# Altium PCB PCB1.PcbDoc (part 7 of 7)
Units mil, origin at the board's own origin, x right, y up, seen from the top; angles counter-clockwise.
Board outline 2100 x 2700 mil, 6 copper layers (Top Layer, Layer 2, Layer 3, Layer 4, Layer 5, Bottom Layer), stack 32.112 mil thick; 200 components, 319 nets, 1280 pads, 807 vias.
Unrouted connection lines stored in the file: 4.
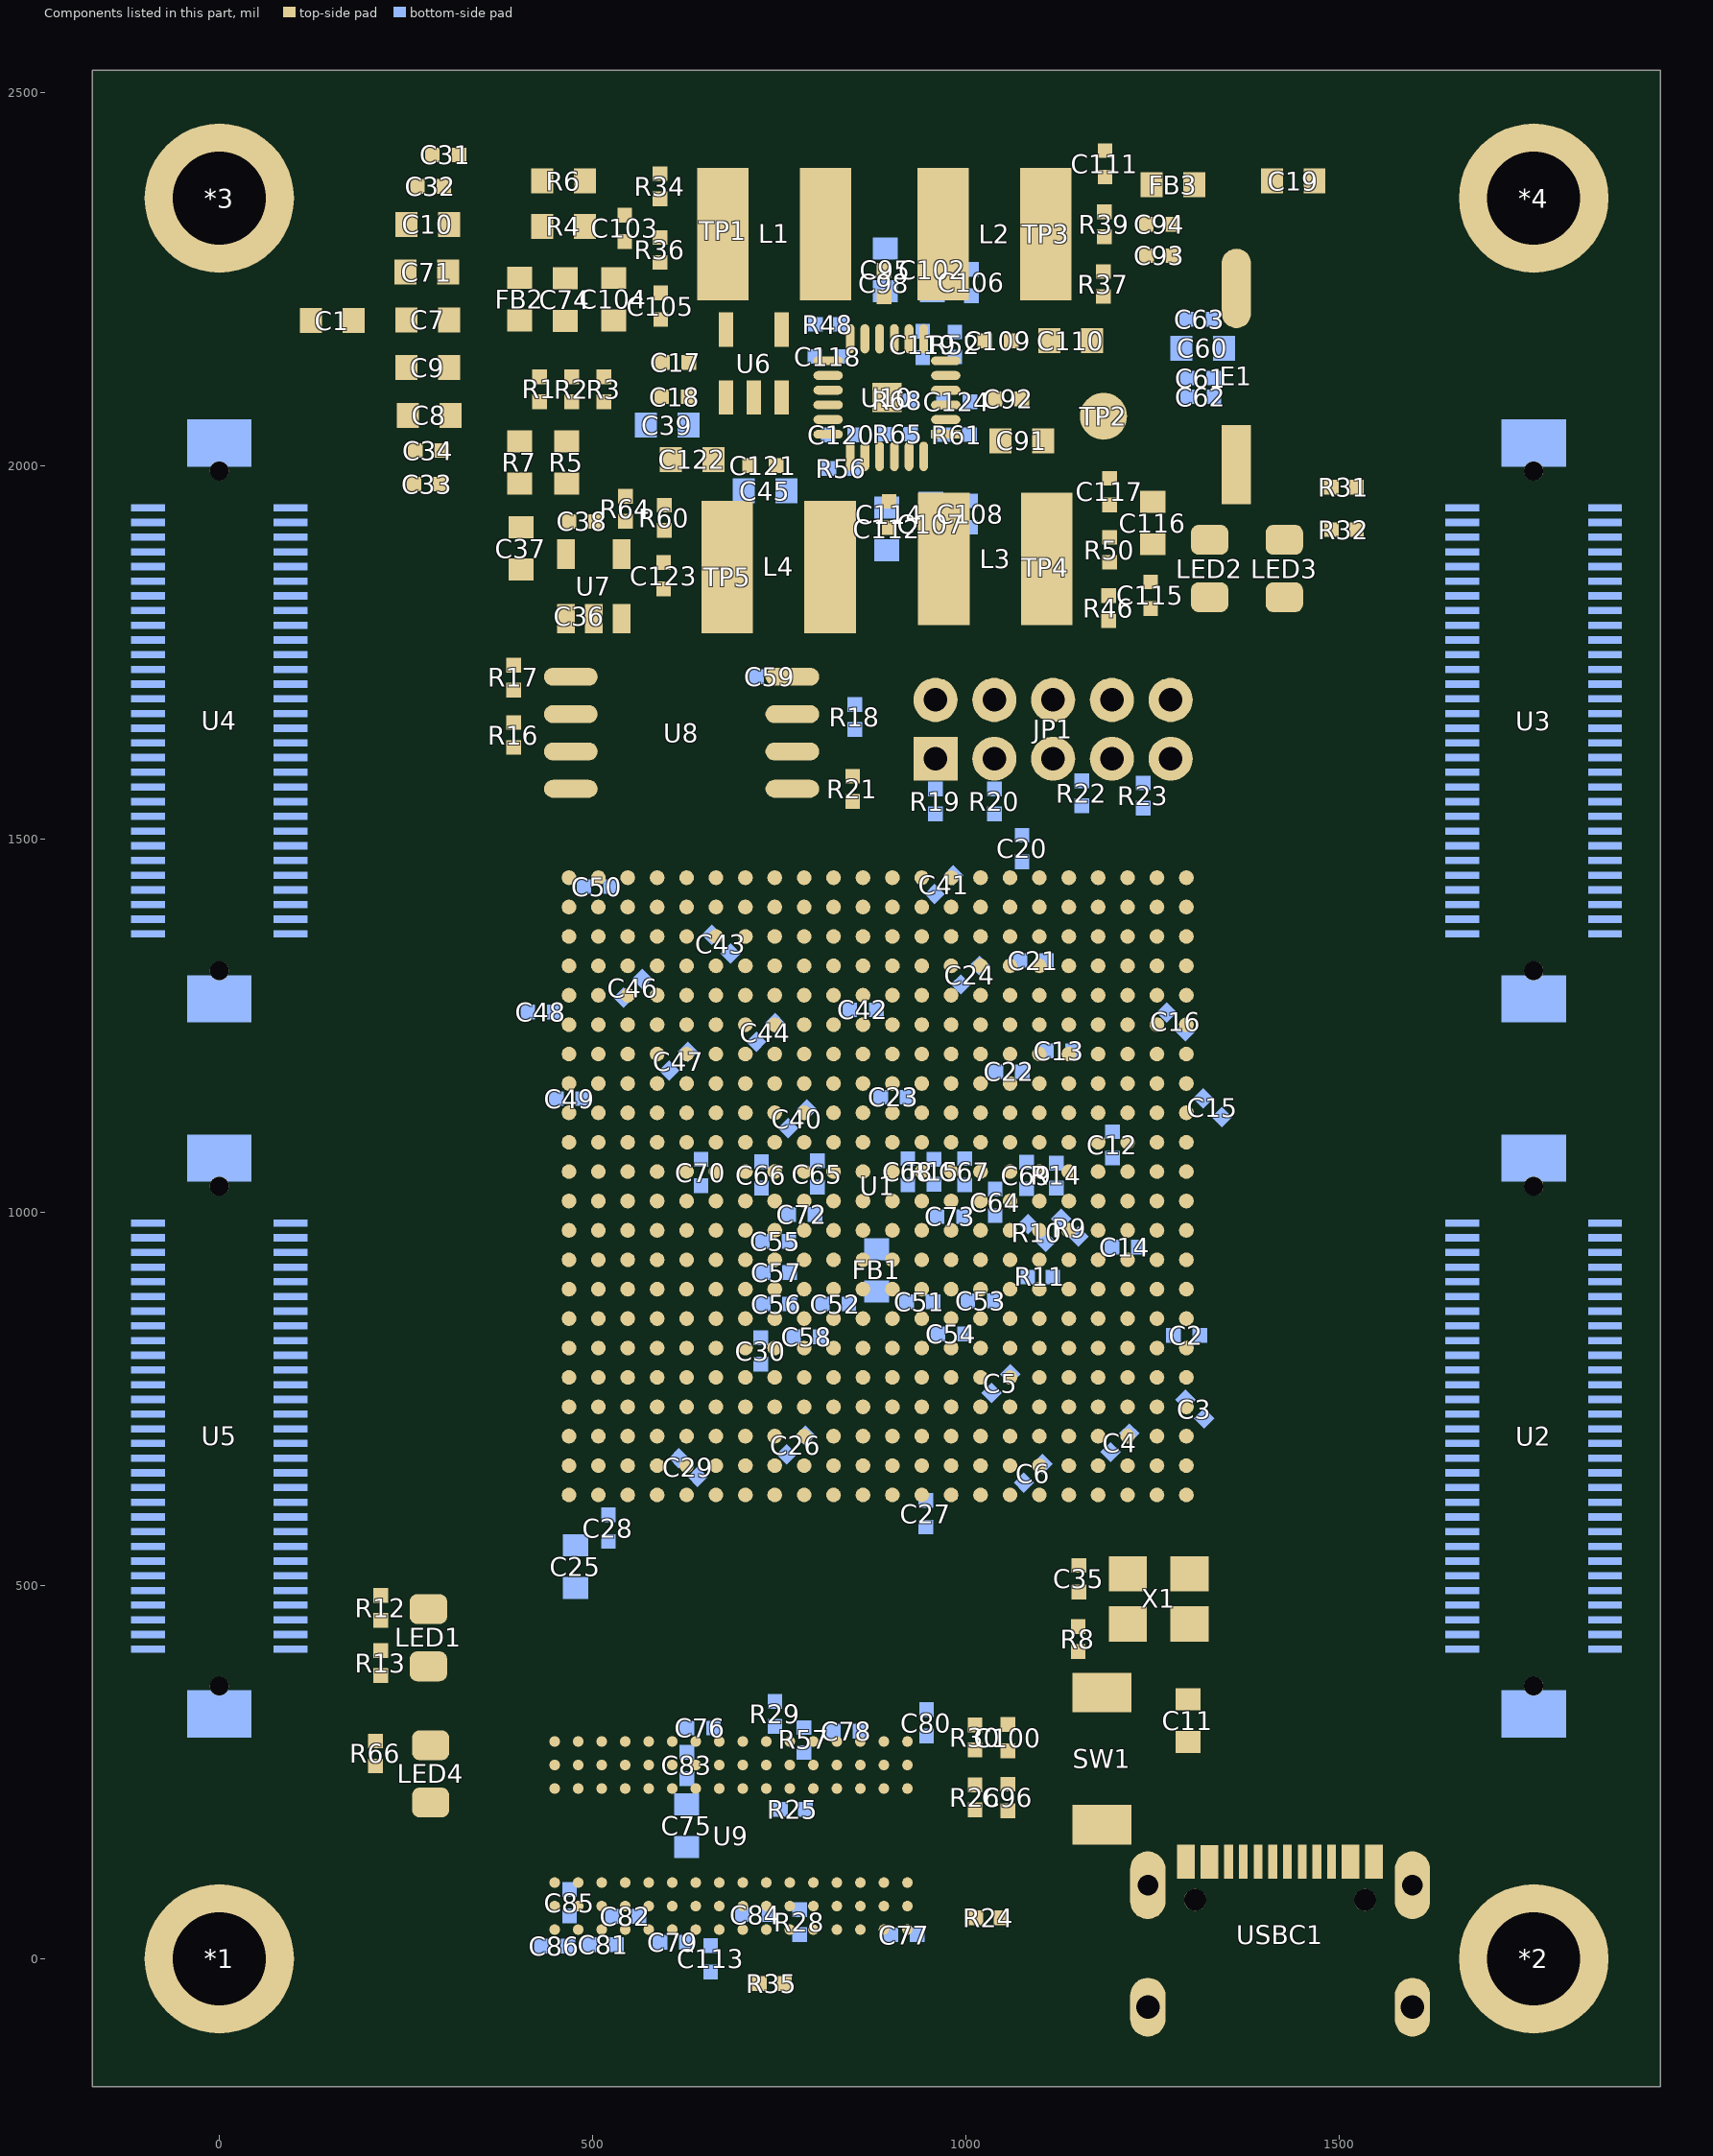
[diagram p11: the components of this part, seen from the top]

## Other copper
Top Layer:
  rectangle net +3.3_B: 642.09,2151.37 721,2184
  rectangle net NetL3_2: 943.21,1959 970,2029
  rectangle net NetL4_2: 812,1949 847,2030
  rectangle net NetL2_2: 943,2174 1002,2229
  rectangle net NetL1_2: 793,2185 846,2232
  region net GND: 1565,209 1535,209 1535,109 1565,109
  region net +5: 1527,209 1503,209 1503,108 1527,108
  rectangle net +5: 1314,107 1338,225
  rectangle net GND: 1276,108 1306,225
  pour cut-out: 43.85,1164.29 56.44,1176.87 830.16,1176.87 1123.29,1470 1377.63,1470 1454.42,1393.21 1451,1389.79 1451,974.74 1615.38,810.36 1615.38,697.77 1571.77,697.77 1464,590 423,590 423,771 210,984 65,984
  pour cut-out: 401.45,1308.33 405.62,1312.51 564.99,1312.51 564.99,1298.01 576.46,1286.54 576.46,1182.21 404.79,1182.21 394,1193
  pour cut-out: 447,1597 447,1526 440,1519 443.29,1515.71 678.79,1515.71 678.79,1593.79 680,1595
  pour cut-out: 696.86,1524.82 696.86,1286.14 721,1262 881,1262 881,1270.22 901.26,1290.48 891.41,1300.33 891.41,1518.77
  pour cut-out: 838,1723 843,1728 968,1728 968,1675 998,1645 998,1531 908,1531 837,1602 837,1684
Layer 3:
  pour cut-out: 613,404 967.94,404 1015,356.94 1015,98 998.23,98 943.97,43.74 615.26,43.74 504,155 504.09,155.09 504.09,361.03
  pour cut-out: 783,1555 884,1555 1005.29,1676.29 1769.47,1676.29 1776.21,1669.54 1763,1656.34 1763,1404 1756,1404 1583,1231 1583,720 1472,720 1379,627 1384,622 1384,555 608.6,555 529.12,475.52 493.65,511 405,511 405,495.25 330.51,420.76 329.96,421.3 134.7,421.3 29.69,526.31 29.69,850.69 186,1007 393.23,1007 405,1018.77 400,1023.77 400,1424 281.37,1424 231.34,1474.03 231.34,1572.34 287,1628 298,1617 725,1617
Layer 4:
  pour cut-out: 240,1811 897,1811 964,1744 1560.5,1744 1591.97,1712.53 1591.97,837.47 1318.5,564 1089,564 903,378 903,57 839,-7 837,-5 502,-5 502,44.15 326,220.15 326,570 66,830 66,1654 140,1728
Bottom Layer:
  pour cut-out: 197,1452 195,1450 195,604 207.61,604 250.51,561.11 257.9,568.5 1426.5,568.5 1521.5,663.5 1506.13,678.87 1506.13,1666.95 951.05,1666.95 885,1733 885,1821 850,1821 701.3,1969.7 633.33,1969.7 633.33,1970.67 583,2021 406,2021 197,1812
Layer 5 (plane layer: these items are gaps in the copper):
  lines w10: 404,825 404,448 330,374 330,-11 342,-23 1054,-23 1517,440 1517,1766 ; 407,1232 593,1046 593,1032 ; 408,1227 408,2087 485,2164 807,2164 856,2213 856,2450 ; 537,1400 508,1400 487.87,1420.13 487.87,1459.87 508,1480 541,1480 541,1898 ; 538,1401 538,1283 633.51,1187.49 1026.51,1187.49 1085,1129 1085,989 1094,980 ; 538,1901 705,2068 1293,2068 1315,2090 1315,2452 859,2452 857,2450 856,2450 ; 593,1031 963,1031 1015,979 1120,979 1146,953 1146,858 ; 860,2068 659,1867 659,1588 751,1496 960,1496 1039.14,1416.86 1039.14,1187.49 ; 1025,824 1025,475 1125,375 1180,375 1253,448 1254,448 1318,512 1318,1426 1033,1711 ; 1034,1712 1034,1856 1109,1931 1352,1931 1517,1766 ; 1148,860 1112,824 304,824 280,848 280,2394 336,2450 856,2450 ; 1182,99 1643,99 1697,153 1697,1810 ; 1330,1933 1408,2011 1581,2011 1583,2011 1654,1940 1775,1940 1786,1929 1786,1832 1764,1810 1699,1810 ; 1517,1750 1517,1766 ; 1683.36,2086.4 1779.36,1990.4 ; 1684.36,2100.4 1780.36,2004.4 ; 1688.18,2098.54 1784.18,2002.54

## Silkscreen, mask and mechanical layers (free items; w line width, h text height)
Top Overlay:
  drawing of 86 lines, arcs and shapes, not listed
  text "+5" at 1126.81,2102.98 h15
  text "+5" at 1313,1768 h15
  text "+3.3" at 1405,1767 h15
  text "JTAG" at 1366,1719 h15
  text "FLASH" at 587.81,1506.98 h15
  text "XC7A35T" at 426,1499 h15
  text "Xilinx XC7A35T" at 1598,655 h60 r90
  text "DONE" at 252,515 h15
  text "DDR3" at 428.98,342.98 h15
  text "POWER" at 1386,180 h15
  text "B16_IO0" at 239,142.5 h15
  text "RST" at 1160.81,123.98 h15
Bottom Overlay:
  text "+1" at 685,2250 h15
  text "+1.8" at 1132,2239 h15
  text "+1.5" at 1134,1798 h15
  text "+3.3" at 708,1784 h15
Mechanical 1:
  the board outline again, w10